# Altium PCB PCB_Rev3.PcbDoc
Units mil, origin at the board's own origin, x right, y up, seen from the top; angles counter-clockwise.
Board outline 1472.66 x 1252.33 mil, 4 copper layers (Top Layer, Layer 1 (GND), Layer 2 (PWR), Bottom Layer), stack 61.2 mil thick; 63 components, 42 nets, 246 pads, 78 vias.
Unrouted connection lines stored in the file: 48.
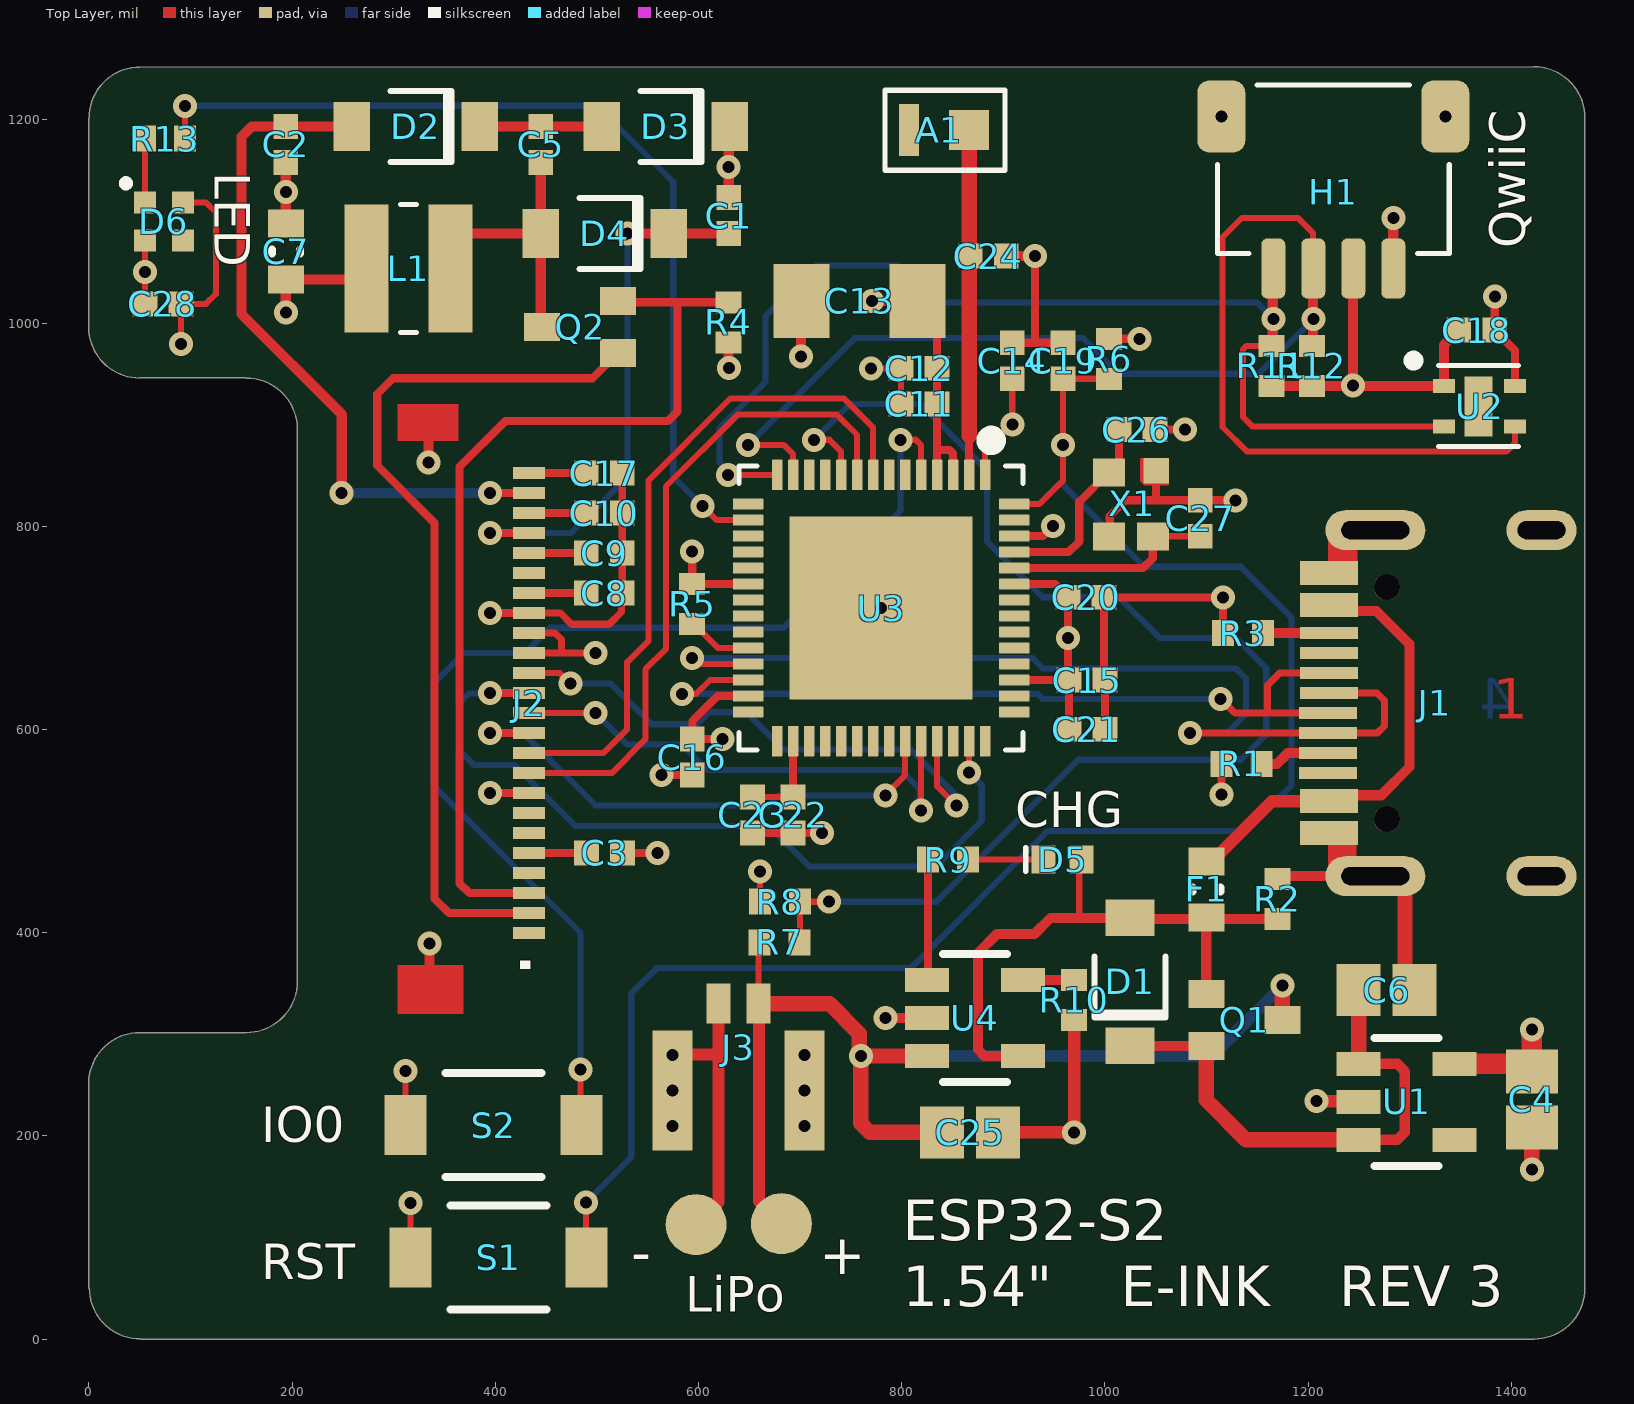
[diagram p0: Top Layer view]
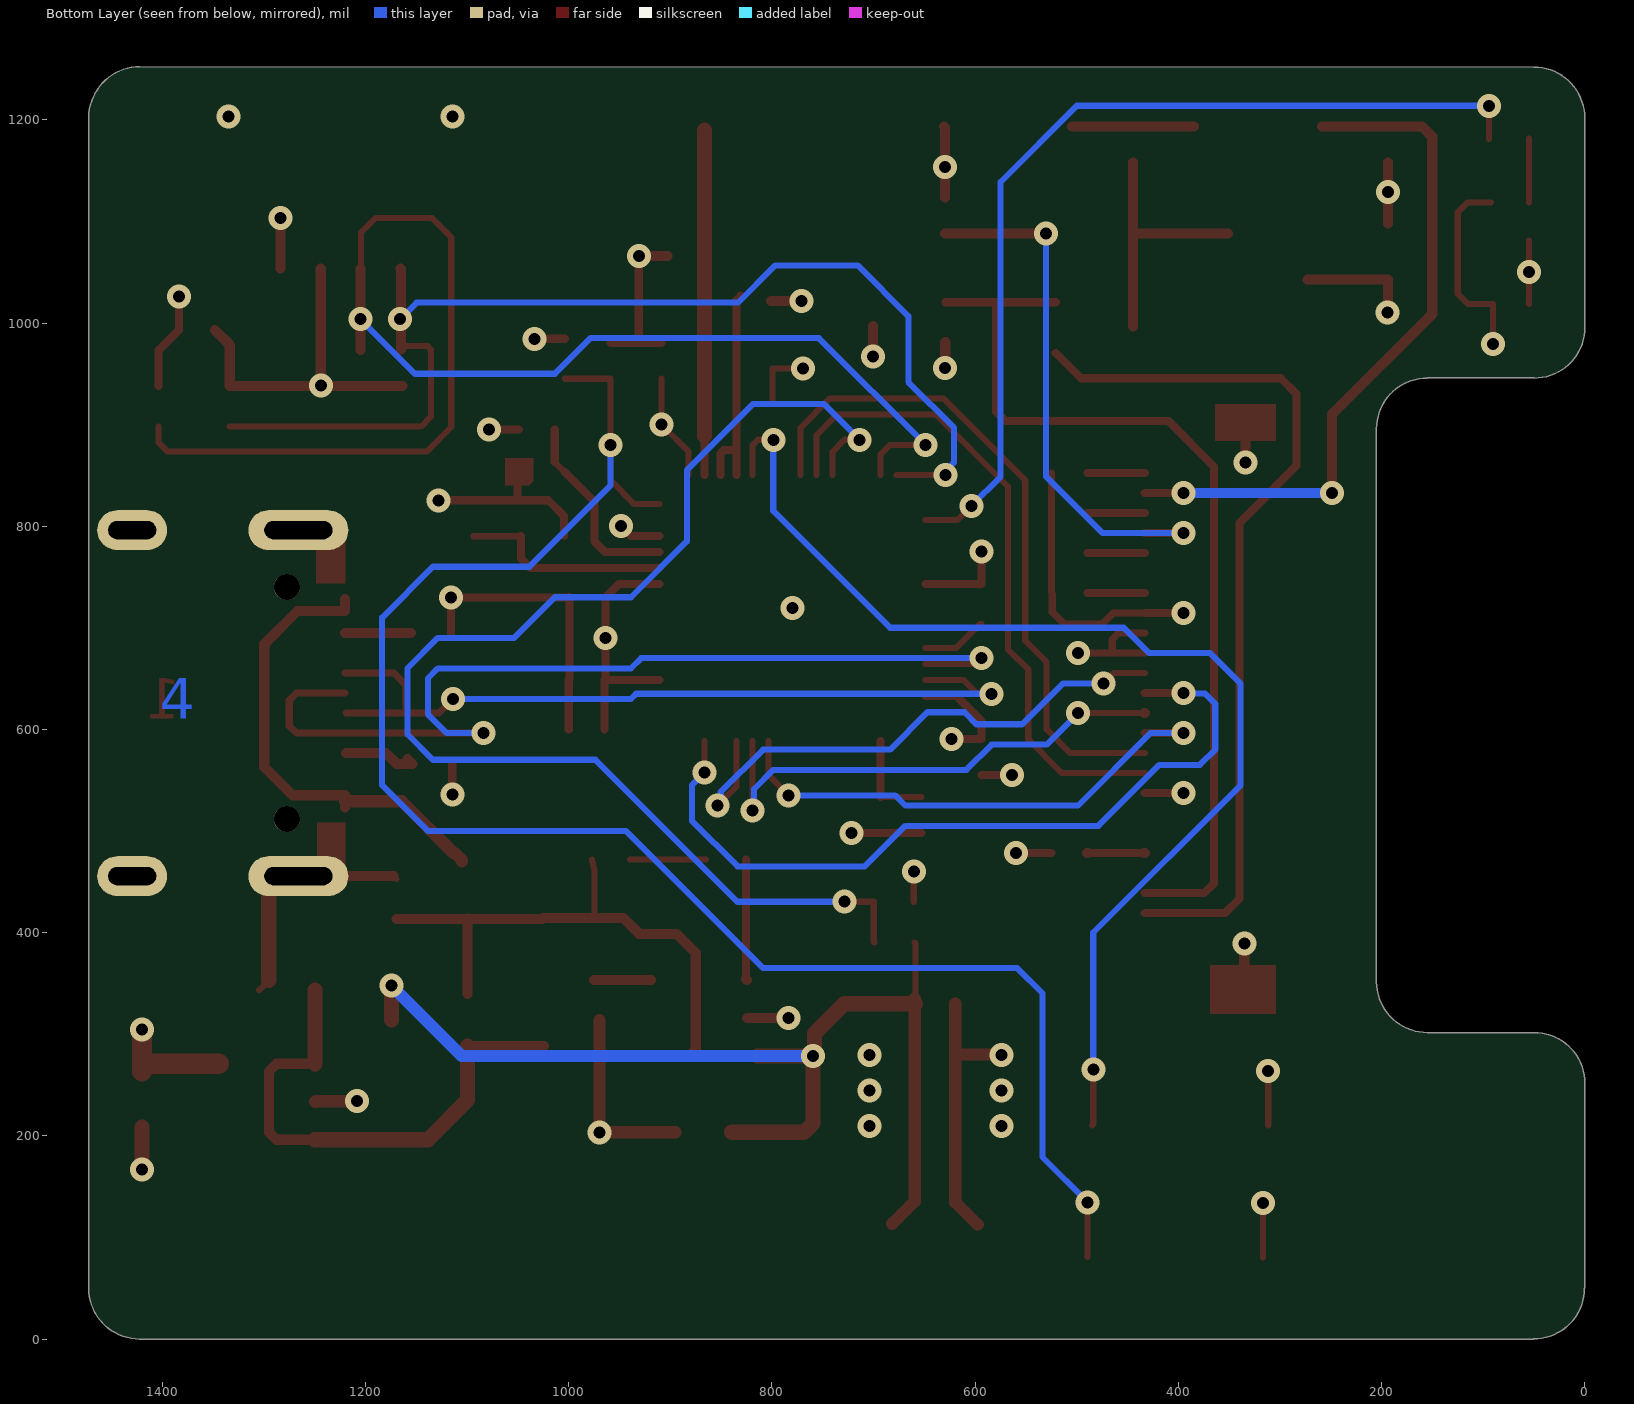
[diagram p1: Bottom Layer view, seen from below]
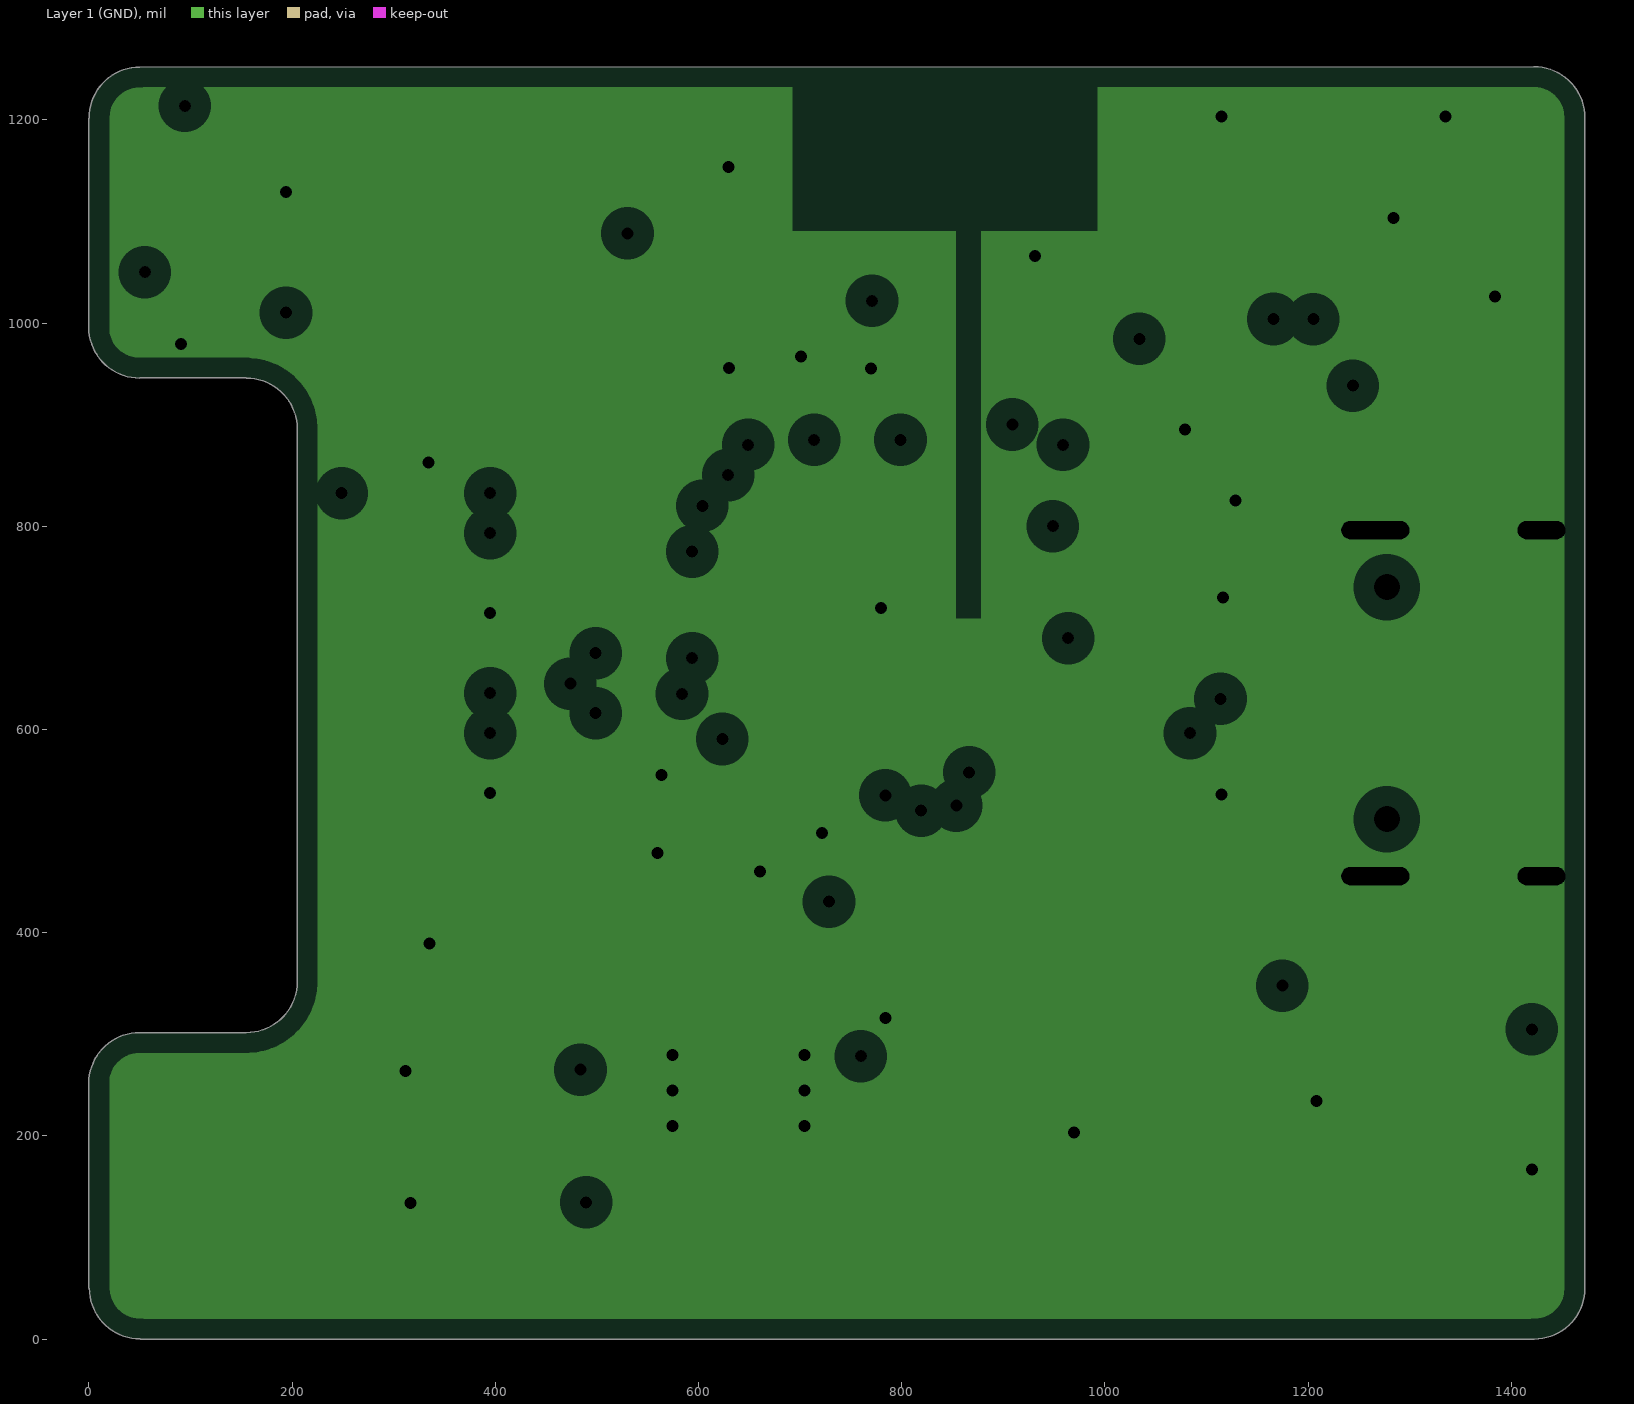
[diagram p2: Layer 1 (GND), clearances drawn from the general rule]
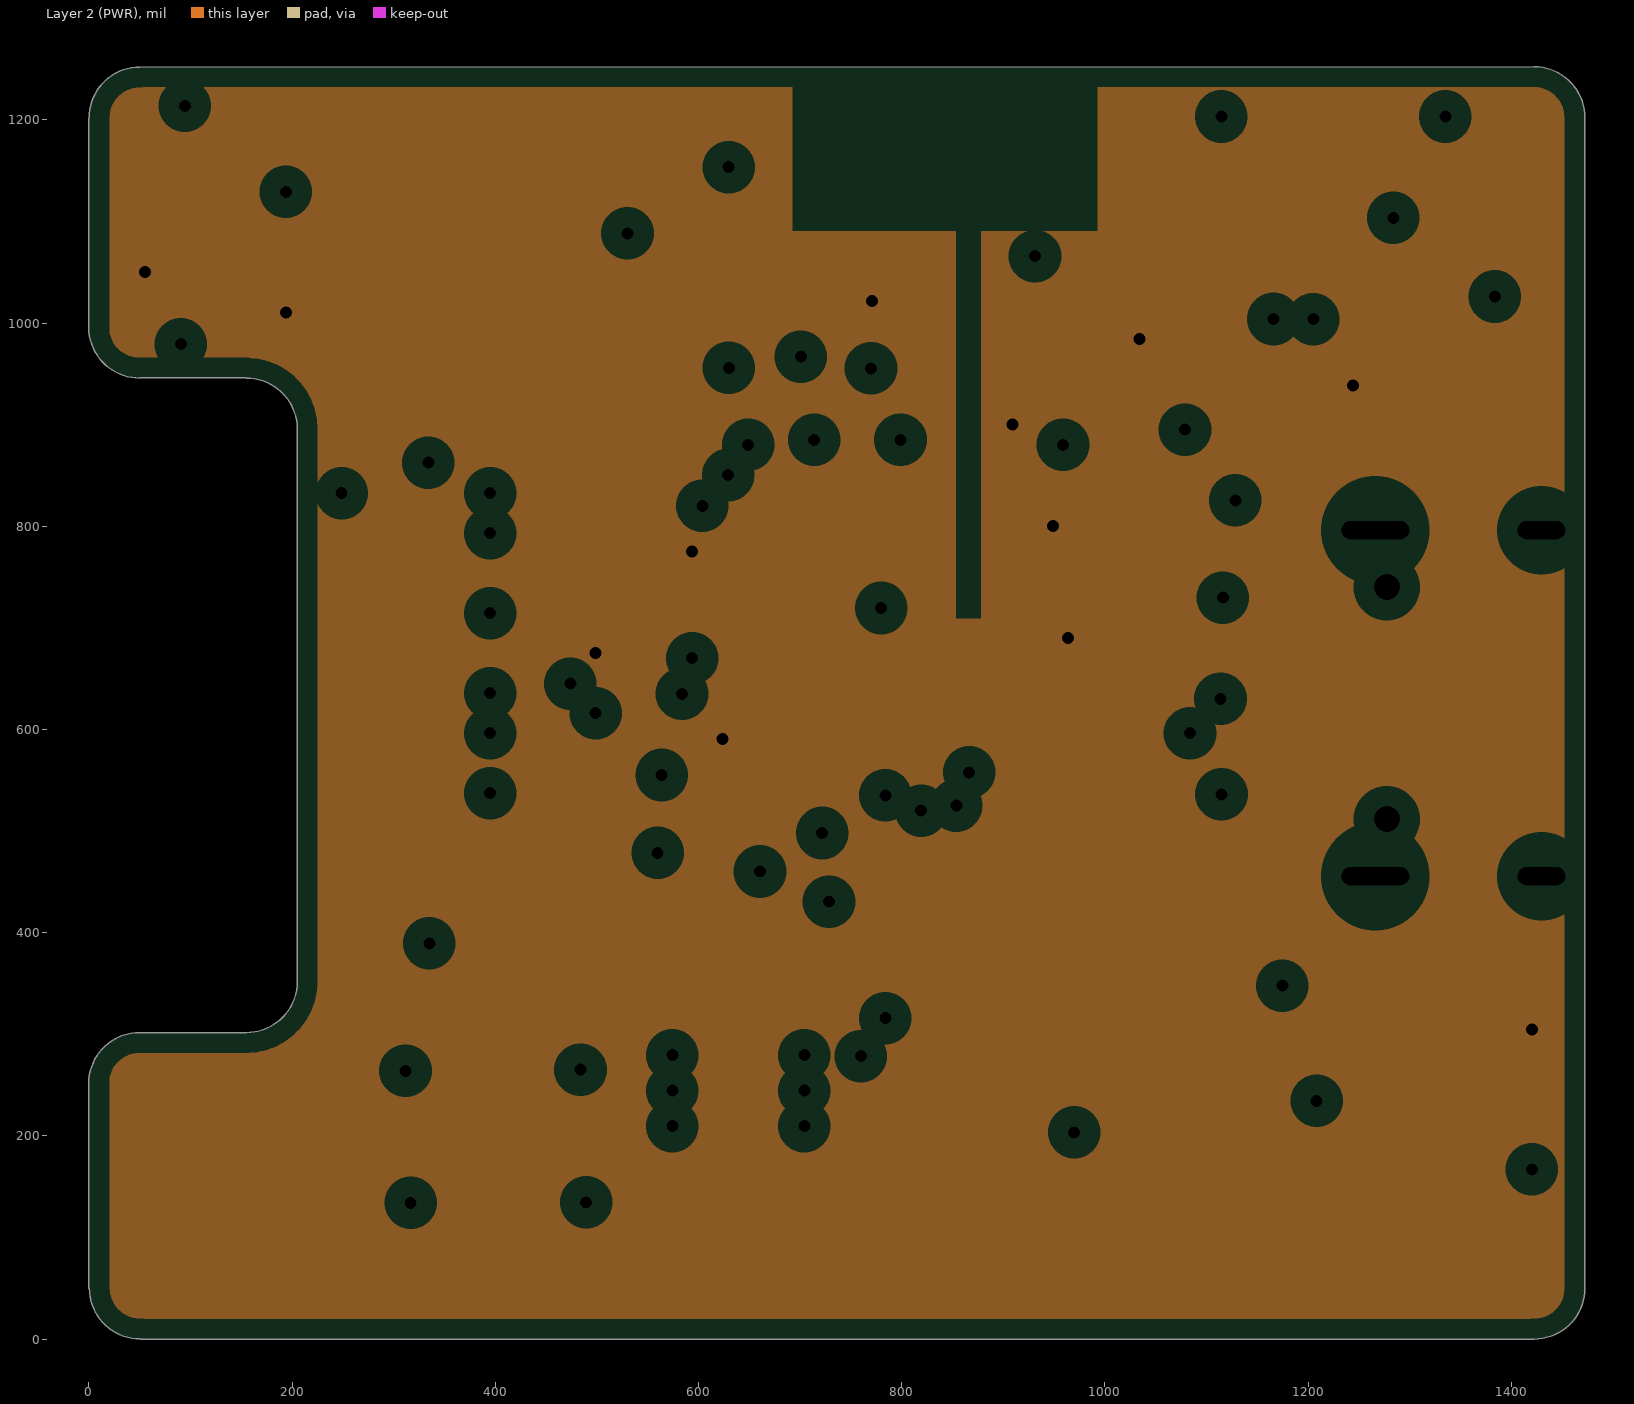
[diagram p3: Layer 2 (PWR), clearances drawn from the general rule]
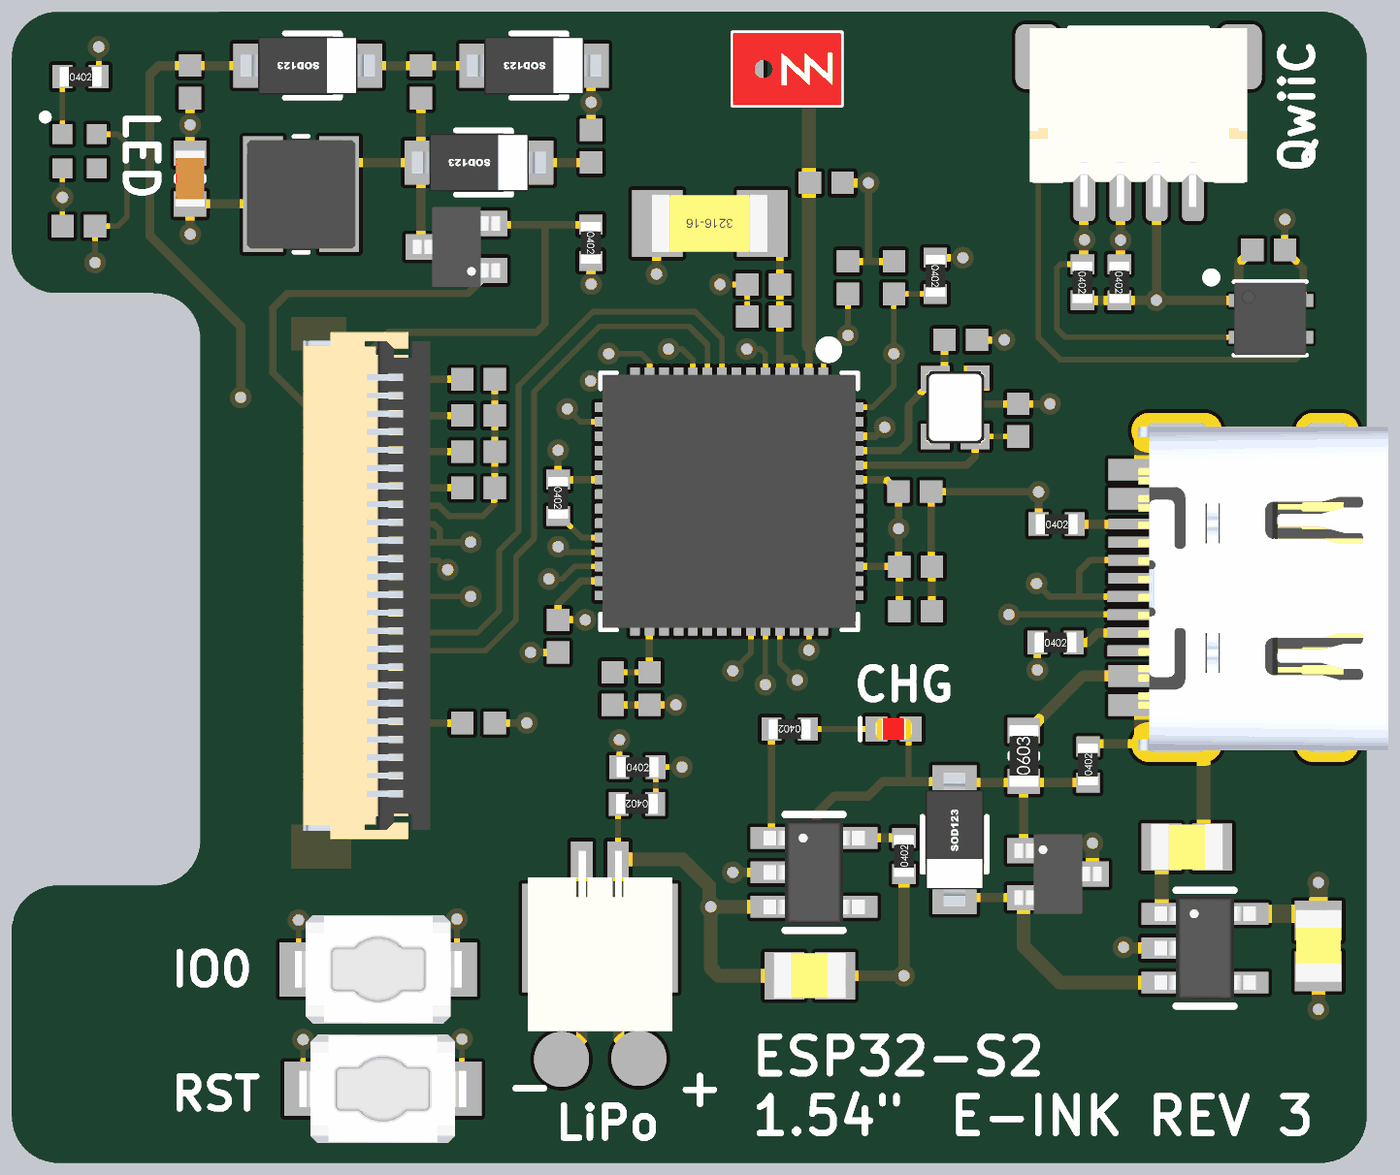
[diagram p4: 3D render of the assembled board from above, using the file's embedded part models]

## Layer stack, top to bottom
Top Solder: solder mask 0.4, Solder Resist, Dk 3.5
Top Layer: signal copper 1.4
Dielectric 2: prepreg 2.8, PP-006, Dk 4.1
Layer 1 (GND): plane copper 1.2, net GND
Dielectric 1: dielectric 50.4, FR-4, Dk 4.8
Layer 2 (PWR): plane copper 1.2, net +3.3V
Dielectric 3: prepreg 2.8, PP-006, Dk 4.1
Bottom Layer: signal copper 1.4
Bottom Solder: solder mask 0.4, Solder Resist, Dk 3.5

## Board outline
0,50.11 0,251.84 -0.22,251.84 cw(c49.78,251.76) 49.89,301.76 154.89,301.76 ccw(c155,351.76) 205,351.68 205,896 ccw(c155,895.92) 154.89,945.92 154.89,946.14 49.89,946.14 49.89,945.92 cw(c49.78,995.92) -0.22,995.85 0,995.85 0,1201.89 0.08,1201.89 cw(c50.08,1202) 50,1252 50,1251.97 1422.08,1252.33 cw(c1422.19,1202.08) 1472.44,1202.16 1472.44,50.19 cw(c1422.44,50.08) 1422.52,0.08 1422.11,0 50.44,0 50.44,0.19 cw(c50.33,50.19)

## Design rules (kind name [scope] priority, off if disabled: settings)
Clearance Clearance_U2 [All vs InComponent('U2')] p1: gap=6 ignorepadtopadclearanceinfootprint=FALSE
Clearance Clearance_U3 [All vs InComponent('U3')] p2: gap=5.5 ignorepadtopadclearanceinfootprint=FALSE
Clearance Clearance_J1 [All vs InComponent('J1')] p3: gap=5 ignorepadtopadclearanceinfootprint=FALSE
Clearance Clearance_J2 [All vs InComponent('J2')] p4: gap=5 ignorepadtopadclearanceinfootprint=FALSE
Clearance [All] p5: gap=7.7 ignorepadtopadclearanceinfootprint=FALSE
MinimumSolderMaskSliver [All] p1: minsoldermaskwidth=1.8
PlaneClearance [All] p1: clearance=20
PlaneConnect PlaneConnect_Via [(IsVia)] p1: planeconnectstyle=Direct reliefexpansion=20 reliefentries=4 reliefconductorwidth=10 reliefairgap=10
PlaneConnect [All] p2: planeconnectstyle=Relief reliefexpansion=20 reliefentries=4 reliefconductorwidth=10 reliefairgap=10
PolygonConnect [All] p1: connectstyle=Relief reliefconductorwidth=10 reliefentries=4 polygonreliefangle="90 Angle" airgapwidth=10
RoutingVias [All] p1: holewidth=28 width=50 viastyle="Through Hole" minholewidth=28 minwidth=50 maxholewidth=28 maxwidth=50
SilkToSilkClearance [All] p1: silktosilkclearance=2
SilkToSolderMaskClearance [IsPad] p1: minsilkscreentomaskgap=2 clearancetoexposedcopper=TRUE
SolderMaskExpansion [All] p1: expansion=4 istentingtop=FALSE
Width [All] p1: maxlimit=25 minlimit=6 preferedwidth=6
25 further rules are at their usual default settings.

## Components (designator, comment, footprint, x,y, rotation, side; value= is the part's Value field where it differs from the comment)
A1 "NN02-101" NN02-101 836.81,1189.88 r180 top value="Chip Antenna"
C1 "1uF" CAPC1005X56N 629.69,1105.87 r90 top
C2 "1uF" CAPC1005X56N 193.69,1175.87 r90 top
C3 "1uF" CAPC1005X56N 507.4,478.58 r180 top
C4 "10uF" CAPC2012X140N 1420.08,236.02 r270 top
C5 "1uF" CAPC1005X56N 444.69,1175.87 r270 top
C6 "10uF" CAPC2012X140N 1277.24,343.58 r0 top
C7 "2.2uF" CAPC1608X09L 193.69,1070.59 r90 top
C8 "1uF" CAPC1005X56N 507.17,734.25 r180 top
C9 "1uF" CAPC1005X56N 507.17,773.62 r180 top
C10 "1uF" CAPC1005X56N 507.17,812.99 r180 top
C11 "0.1uF" CAPC1005X56N 817.09,920.54 r180 top
C12 "1uF" CAPC1005X56N 817.09,955.54 r180 top
C13 "100uF" CAPC3216X160N 758.62,1021.91 r180 top
C14 "0.1uF" CAPC1005X56N 908.73,962.93 r90 top
C15 "0.1uF" CAPC1005X56N 982.4,648.72 r0 top
C16 "0.1uF" CAPC1005X56N 593.73,572.93 r270 top
C17 "1uF" CAPC1005X56N 507.17,852.36 r180 top
C18 "0.1uF" CAPC1005X56N 1365.97,993.15 r0 top
C19 "1uF" CAPC1005X56N 958.73,962.93 r90 top
C20 "0.1uF" CAPC1005X56N 981.45,730.21 r0 top
C21 "1uF" CAPC1005X56N 982.28,600.19 r0 top
C22 "0.1uF" CAPC1005X56N 693.07,515.91 r270 top
C23 "1uF" CAPC1005X56N 653.07,515.91 r270 top
C24 "1pF" CAPC1005X56N 885.16,1065.98 r0 top
C25 "10uF" CAPC2012X140N 867.24,203.58 r0 top
C26 "10pF" CAPC1005X56N 1031.45,895.21 r0 top
C27 "10pF" CAPC1005X56N 1093.73,807.93 r90 top
C28 "0.1uF" CAPC1005X56N 72.75,1018.91 r0 top
D1 "MBR0520" SOD123 1024.69,351.58 r90 top
D2 "MBR0520-TP" SOD123 321.69,1193.58 r180 top value=MBR0520
D3 "MBR0520-TP" SOD123 567.69,1193.58 r180 top value=MBR0520
D4 "MBR0520-TP" SOD123 507.69,1088.15 r180 top value=MBR0520
D5 "Red Led" LED1005X40N-Red 958.39,471.91 r0 top
D6 "RGB" SK6805-E-J 73.73,1100.21 r270 top value=NeoPixel
F1 "TLC-PSMD050" "RESC1608X06L (0603 FOOTPRINT)" 1100,442.74 r90 top
H1 "QWiiC" SM04B-SRSS-TB 1224.69,1128.58 r180 top locked
J1 "USB-C" TYPE-C-31-M-12 1421.81,796.26 r90 top locked
J2 "24POS Flex Connector" 687124182122 433.07,625.98 r90 top
J3 "CON2" JST_Micro_2PIN 639.21,330.2 r0 top locked
L1 "68uH" "INDUCTOR, 3mmX3mm" 314.47,1053.58 r180 top
Q1 "LP1480WT1G" SC-70 1137.09,314.17 r0 top
Q2 "AO7400" SC-70 483.31,996.32 r180 top
R1 "5.1K" "RESC1005X40L (0402 FOOTPRINT)" 1134.33,566.18 r0 top
R2 "100K" "RESC1005X40L (0402 FOOTPRINT)" 1169.69,433.27 r90 top
R3 "5.1K" "RESC1005X40L (0402 FOOTPRINT)" 1135.67,694.88 r0 top
R4 "2.2R" "RESC1005X40L (0402 FOOTPRINT)" 629.33,1000.87 r270 top
R5 "10K" "RESC1005X40L (0402 FOOTPRINT)" 593.73,723.52 r270 top
R6 "10K" "RESC1005X40L (0402 FOOTPRINT)" 1003.73,964.9 r270 top
R7 "100K" "RESC1005X40L (0402 FOOTPRINT)" 679.49,390.54 r180 top
R8 "100K" "RESC1005X40L (0402 FOOTPRINT)" 680.12,430.54 r0 top
R9 "4.7K" "RESC1005X40L (0402 FOOTPRINT)" 845.39,471.91 r180 top
R10 "4K" "RESC1005X40L (0402 FOOTPRINT)" 969.69,333.9 r90 top
R11 "10K" "RESC1005X40L (0402 FOOTPRINT)" 1163.69,957.83 r270 top
R12 "10K" "RESC1005X40L (0402 FOOTPRINT)" 1203.69,957.83 r270 top
R13 "100R" "RESC1005X40L (0402 FOOTPRINT)" 74.72,1181.51 r0 top
S1 "=Value" TS-1088R-02526 403.19,80.54 r180 top
S2 "=Value" TS-1088R-02526 398.19,210.54 r180 top
U1 "HT7833" SOT95P280X144-5N 1296.93,233.58 r0 top
U2 "SHTC3" "DFN-4 (2.0mm X 2.0mm)" 1368.69,918.15 r0 top value=Temp/Humid
U3 "ESP32-S2" "QFN56_0.4mm pitch - Rev2" 779.69,719.58 r270 top
U4 "MCP73831T-2ACI/OT" SOT95P280X144-5N 871.93,315.98 r0 top value=MCP73831T-2ACI
X1 "40 Mhz" OSC20X16 1027.01,822.39 r270 top

## Footprints (in the part's own frame and the unit in brackets; to place one, negate y for a bottom-side part, rotate by r counter-clockwise, add the part's x,y. Pads: shape width x height; smd on the part's side, far side on the other; paste and mask are expansions set on the pad)
687124182122 [mm] "CONN FFC TOP/BOT 24POS 0.50MM R/A"
  rect 0.3x0.8 smd: 1(-5.75,0) 2(-5.25,0) 3(-4.75,0) 4(-4.25,0) 5(-3.75,0) 6(-3.25,0) 7(-2.75,0) 8(-2.25,0) 9(-1.75,0) 10(-1.25,0) 11(-0.75,0) 12(-0.25,0) 13(0.25,0) 14(0.75,0) 15(1.25,0) 16(1.75,0) 17(2.25,0) 18(2.75,0) 19(3.25,0) 20(3.75,0) 21(4.25,0) 22(4.75,0) 23(5.25,0) 24(5.75,0)
  Top Layer region: 6.55,1.761 7.473,1.761 7.473,3.285 6.55,3.285
  Top Layer region: -7.767,1.634 -6.55,1.634 -6.55,3.285 -7.767,3.285
  body extent -6.95,-0.55 7.05,2.95, height 0.96
CAPC1005X56N [mm] "Chip Capacitor, 2-Leads, Body 1.0x0.5mm, IPC Medium Density (0402 ceramic)"
  rect 0.62x0.62 smd: 1(-0.45,0) 2(0.45,0)
  body extent -0.55,-0.3 0.55,0.3, height 0.6
CAPC1608X09L [mm] "Chip Capacitor, 2-Leads, Body 1.6x0.8mm, IPC High Density (0603 dense)"
  rect 0.7x0.9 smd: 1(-0.7,0) 2(0.7,0)
  silkscreen extent -0.05,-0.35 0.05,0.35, body extent -0.89,-0.48 0.88,0.48, height 1.03
CAPC2012X140N [mm] "Chip Capacitor, 2-Leads, Body 2.0x1.3mm, IPC Medium Density (0805 ceramic)"
  rect 1.1x1.3 smd: 1(-0.7,0) 2(0.7,0)
  body extent -1,-0.62 1,0.63, height 1.24
CAPC3216X160N [mm] "Chip Capacitor, 2-Leads, Body 3.2x1.6mm, IPC Medium Density(C1206)"
  rect 1.4x1.85 smd: 1(-1.45,0) 2(1.45,0)
  body extent -1.6,-0.8 1.6,0.8, height 1.89
"DFN-4 (2.0mm X 2.0mm)" [mm] "DFN-4 (2.0mm X 2.0mm)"
  rect 0.55x0.35 smd mask+0.076: 1(-0.889,0.508) 2(-0.889,-0.508) 3(0.889,-0.508) 4(0.889,0.508)
  rect 0.7x1.5 smd paste-0.1 mask+0.076: 7(-0.025,0)
  silkscreen extent -1.78,-1 0.97,1.27, body extent -1.02,-1 0.98,1, height 0.75
"INDUCTOR, 3mmX3mm" [mm] "Inductor, 2-Leads, (3mmX3mm)"
  rect 1.1x3.2 smd: 1(-1.05,0) 2(1.05,0)
  silkscreen extent -0.2,-1.6 0.2,1.6, body extent -1.5,-1.5 1.5,1.5, height 1.5
JST_Micro_2PIN [mm]
  rect 0.6x1 smd: 1(0.5,0) 2(-0.5,0)
  rect 1x3 smd: ""(-1.65,-2.175) ""(1.65,-2.175)
  body extent -1.99,-4.74 2,0.24, height 2.9
LED1005X40N-Red [mm] "Chip LED 2-Leads, Body 1.0x0.5mm, (0402)"
  rect 0.6x0.7 smd: 1(-0.475,0) 2(0.475,0)
  silkscreen extent -0.92,-0.3 -0.92,0.3, body extent -0.5,-0.3 0.5,0.3, height 0.2
NN02-101 [mm] "COMPACT REACH XTEND - 101"
  rect 1x1 smd: 1(-0.75,0)
  rect 0.5x1.3 smd: 2(0.75,0)
  silkscreen extent -1.65,-1 1.35,1, body extent -1.65,-1 1.35,1, height 0.8
OSC20X16 [mm] "Crystal 2.0mm x 1.60mm 0.5mm height"
  rect 0.7x0.8 smd: 1(-0.783,-0.591) 2(0.817,-0.591) 3(0.817,0.509)
  rect 0.635x0.635 smd: 4(-0.817,0.591)
  Top Layer region: -1.138,0.196 -0.554,0.196 -0.453,0.298 -0.453,0.907 -1.138,0.907
  body extent -1.01,-0.87 1.04,0.78, height 0.4
"QFN56_0.4mm pitch - Rev2" [mil] "QFN, 56-Leads, Body 7x7mm, Pitch 0.4mm, IPC Medium Density"
  rrect9% 30x10.5 smd: 1(-130.95,102.36) 2(-130.95,86.61) 3(-130.95,70.87) 4(-130.95,55.12) 5(-130.95,39.37) 6(-130.95,23.62) 7(-130.95,7.87) 8(-130.95,-7.87) 9(-130.95,-23.62) 10(-130.95,-39.37) 11(-130.95,-55.12) 12(-130.95,-70.87) 13(-130.95,-86.61) 14(-130.95,-102.36) 29(130.95,-102.36) 30(130.95,-86.61) 31(130.95,-70.87) 32(130.95,-55.12) 33(130.95,-39.37) 34(130.95,-23.62) 35(130.95,-7.87) 36(130.95,7.87) 37(130.95,23.62) 38(130.95,39.37) 39(130.95,55.12) 40(130.95,70.87) 41(130.95,86.61) 42(130.95,102.36)
  rrect9% 10.5x30 smd: 15(-102.36,-130.95) 16(-86.61,-130.95) 17(-70.87,-130.95) 18(-55.12,-130.95) 19(-39.37,-130.95) 20(-23.62,-130.95) 21(-7.87,-130.95) 22(7.87,-130.95) 23(23.62,-130.95) 24(39.37,-130.95) 25(55.12,-130.95) 26(70.87,-130.95) 27(86.61,-130.95) 28(102.36,-130.95) 43(102.36,130.95) 44(86.61,130.95) 45(70.87,130.95) 46(55.12,130.95) 47(39.37,130.95) 48(23.62,130.95) 49(7.87,130.95) 50(-7.87,130.95) 51(-23.62,130.95) 52(-39.37,130.95) 53(-55.12,130.95) 54(-70.87,130.95) 55(-86.61,130.95) 56(-102.36,130.95)
  rect 180x180 smd paste-157.48: 57(0,0)
  silkscreen extent -172,-140 140,140, body extent -138,-138 138,138, height 31
"RESC1005X40L (0402 FOOTPRINT)" [mm] "Chip Resistor, 2-Leads, Body 1.0x0.5mm, IPC Medium Density (0402)"
  rect 0.55x0.65 smd: 1(-0.5,0) 2(0.5,0)
  body extent -0.57,-0.27 0.58,0.28, height 0.41
"RESC1608X06L (0603 FOOTPRINT)" [mm] "Chip Resistor, 2-Leads, Body 1.6x0.8mm, IPC High Density (0603 dense)"
  rect 0.7x0.9 smd: 1(-0.7,0) 2(0.7,0)
  silkscreen extent -0.05,-0.35 0.05,0.35, body extent -0.85,-0.4 0.85,0.4, height 0.56
SC-70 [mm] "SOT23, 3-Leads, Body 2x1.25mm, Pitch 0.65mm"
  rect 0.9x0.7 smd: 1(-0.95,0.65) 2(-0.95,-0.65) 3(0.95,0)
  body extent -1.2,-1.1 1.2,1.1, height 1
SK6805-E-J [mm] "NeoPixel 1.5mm x 1.5mm"
  rect 0.55x0.55 smd: 1(-0.475,-0.475) 2(0.475,-0.475) 3(0.475,0.475) 4(-0.475,0.475)
  silkscreen extent -1.03,-1.03 -0.87,-0.87, body extent -0.7,-0.7 0.7,0.7, height 0.65
SM04B-SRSS-TB [mm] "CONN HEADER 4POS .100 R/A QWIIC"
  rrect50% 0.6x1.5 smd: 1(1.5,1.9) 2(0.5,1.9) 3(-0.5,1.9) 4(-1.5,1.9)
  rrect50% 1.2x1.8 smd: 5(-2.8,-1.9) 5(2.8,-1.9)
  silkscreen extent -2.9,-2.69 2.9,1.52, body extent -3,-2.69 3,2.26, height 3.25
SOD123 [mil] "Molded Diode, 2-Leads, Body 2.85x1.8mm, IPC Medium Density (SOD123)"
  rect 36x48 smd: 1(-63,0) 2(63,0)
  silkscreen extent -35,-35 25,35, body extent -73,-31 73,31, height 50
SOT95P280X144-5N [mm] "SOT23, 5-Leads, Body 3.1x3.0mm (max), Pitch 0.95mm, IPC Medium Density (RFMD SOT23-5)"
  rect 1.1x0.6 smd: 1(-1.2,0.95) 2(-1.2,0) 3(-1.2,-0.95) 4(1.2,-0.95) 5(1.2,0.95)
  silkscreen extent -0.8,-1.6 0.8,1.6, body extent -1.4,-1.45 1.4,1.45, height 1.45
TS-1088R-02526 [mm] "SWITCH TACTILE SPST-NO 0.05A 12V"
  rect 1.05x1.5 smd: 1(-2.2,0) 2(2.2,0)
  silkscreen extent -1.2,-1.3 1.2,1.3, body extent -2.3,-1.5 2.3,1.5, height 2
TYPE-C-31-M-12 [mm] "USB-C Connector"
  oval 1x1.75 hole 0.45 slot 1.2 at 90 deg: 1(-8.65,-0.2) 1(0,-0.2)
  oval 1x2.5 hole 0.45 slot 1.7 at 90 deg: 1(-8.65,3.955) 1(0,3.955)
  rect 0.3x1.45 smd: A1(-7.726,5.119) A4(-6.926,5.117) A5(-5.575,5.142) A6(-4.575,5.142) A7(-4.075,5.117) A8(-3.075,5.117) A9(-1.727,5.117) A12(-0.924,5.117) B1(-1.224,5.117) B4(-2.021,5.117) B5(-2.575,5.117) B6(-3.575,5.117) B7(-5.075,5.142) B8(-6.075,5.142) B9(-6.626,5.117) B12(-7.426,5.119)
  round 0.65 hole 0.65 unplated: ""(-7.225,3.667) ""(-1.425,3.667)
  body extent -8.82,-1.89 0.12,5.01, height 3.31

## Part data
A1: "Antenna Chip 2.4Gig", Manufacturer=Ignion, Part_Number=NN02-101, Vendor=Digi-Key
C1 C2 C3 C5 C8 C9 C10 C12 C17 C19 C21: library part CAP_0402, "CAP 1uF 0402"
  C1 C2 C3 C5 C8 C9 C10 C17: Part_Footprint=0402
  C12 C21: Part_Footprint=0402, Vendor=LCSC
C4 C6 C25: library part CAP_0805, "CAP 10uF 0805", Part_Footprint=0805
C7: library part CAP_0402, "CAP 2.2uF 0603", Part_Footprint=0603
C11 C14 C15 C16 C18 C20 C22 C23 C28: library part CAP_0402, "CAP 0.1uF 0402", Part_Footprint=0402
  C11 C14 C15 C16 C20 C22 C23 C28: Vendor=LCSC
C13: library part CAP_1206, "CAP 100uF 1206", Part_Footprint=1206
C24: library part CAP_0402, "CAP 1pF 0402", Part_Footprint=0402
C26 C27: library part CAP_0402, "CAP 10pF 0402", Part_Footprint=0402, Vendor=LCSC
D1: library part MBR0520-TP, "DIODE SCHOTTKY 20V 500MA SOD-123", Manufacturer=Micro, Part_Footprint=SOD-123, Part_Number=C78746, Vendor=LCSC
D2 D3 D4: "DIODE SCHOTTKY 20V 500MA SOD-123", Manufacturer=Micro, Part_Footprint=SOD-123, Part_Number=C78746, Vendor=LCSC
D5: library part LED_0402_SMALL_Red, "LED Red 0402", Manufacturer=Lite-On, Part_Footprint=0402, Part_Number=C364556, Vendor=LCSC
D6: library part SK6805-E-J-1515, "LED,RGB,NEOPIXEL,SK6805-E-J 1515", Manufacturer=Adafruit, Part_Footprint=SMD-1515, Part_Number=4492, Vendor=Digi-Key
F1: library part PTC_FUSE, "PTC FUSE 500mA hold, 1A trip", Manufacturer=TLC, Part_Number=C261942, Vendor=LCSC
H1: library part SM04B-SRSS-TB, "CONN HEADER 4POS .100 R/A QWIIC", Manufacturer=JST, Part_Number=PRT-14417, Vendor=Digi-Key
J1: "CONN RECPT USB-C", Manufacturer=KHE, Part_Footprint=SMT, Part_Number=C165948, Vendor=LCSC
J2: library part 687124182122, "CONN FFC TOP/BOT 24POS 0.50MM R/A", Manufacturer=Wurth, Part_Number=687124182122, Vendor=Digi-Key
J3: library part JST_Micro_CONN_2PIN, "JST MIcro CONN 2POS"
L1: "INDUCTOR 68uH 20% 4mmx4mm", Manufacturer=SXN, Part_Footprint=4mmx4mm, Part_Number=C135265, Vendor=LCSC
Q1: "MOSFET P-CH 20V 1.4A SC-70", Manufacturer=LRC, Part_Footprint=SC-70, Part_Number=C172434, Vendor=LCSC
Q2: "MOSFET N-CH 20V 4A SC70-3", Manufacturer="VBSemi Elec", Part_Footprint=SC70-3, Part_Number=AO7400, Vendor=LCSC
R1 R3: library part RES_0402, "RES 5.1K 0402", Part_Footprint=0402
R2 R7 R8: library part RES_0402, "RES 100K 0402", Part_Footprint=0402
R4: library part RES_0402, "RES 2.2R 0402", Part_Footprint=0402
R5 R6: library part RES_0402, "RES 10K 0402", LCSC_Part_Number=C258091, Manufacturer=Guangdong, Man_Part_Number=RC-02W1002FT, Vendor=LCSC
R9: library part RES_0402, "RES 4.7K 0402", Part_Footprint=0402
R10: library part RES_0402, "RES 4K 0402", Part_Footprint=0402
R11 R12: library part RES_0402, "RES 10K 0402", Part_Footprint=0402
R13: library part RES_0603, "RES 100R 0402", Manufacturer=Yageo, PartNumber=C106232, Man_Part_Number=RC0402FR-07100RL, Vendor=LCSC
S1 S2: library part TS-1088R-02526, "Tactile Micro Switch", Manufacturer=XUNPU, Part_Footprint=SMD, Part_Number=C455281, Vendor=LCSC
U1: "IC LDO 3.3V 0.5A SOT23-5", Manufacturer=Holtek, Part_Footprint=SOT23-5, Part_Number=C164106, Vendor=LCSC
U2: "Humidity/Temperature Sensor", Manufacturer=Sensirion, Part_Number=SHTC3, Vendor=LCSC
U3: "WIFI/Bluetooth, QFN-56 7x7", Manufacturer=Espressif, Part_Footprint=QFN56, Part_Number=C529594, Vendor=LCSC
U4: "Charger IC Lithium-Ion/Polymer SOT23-5", Manufacturer=Microchip, Part_Number=MCP73831T-2ACI/OT, Vendor=Digi-Key
X1: library part 40Mhz, "CRYSTAL 40MHZ 10PF SMD", Manufacturer=ECS, Part_Number=ECS-400-10-37B2-CKM, Vendor=Digi-Key

## Free pads (board coordinates)
  round 60 smd: 2(597.5,112.69) 2(681.56,113.63)

## Via types
v1: diameter 23.62, hole 11.81, Top Layer to Bottom Layer, tented both sides, 78 vias

## Nets (pads, with @x,y where several pads share a name; then routed paths per layer and width w, separated by ;. In a path a pad name is that pad's centre, name@x,y a point inside that pad or via, vN(x,y) a via of type N, cw(c..) or ccw(c..) an arc to the next point about the centre after c; other vN are vias at no path point)
+3.3V: C4.1 C7.1 C11.1 C12.1 C13.1 C14.1 C15.1 C16.1 C18.1 C20.1 C21.1 C28.1 D6.2 H1.3 J2.15 J2.16 L1.2 R5.1 R6.1 R11.2 R12.2 U1.5 U2.1 U3.1 U3.3 U3.4 U3.20 U3.27 U3.45 U3.51 U3.54 | length 1622.9
  Top Layer w6: D6.2 C28.1 C28.1@55.29,1019.17 ; C16.1 C16.1@593.86,590.77 ; U3.1 882.05,873.53 v1(908.73,900.21) C14.1 ; C15.1@963.73,649.67 C15.1 ; v1(1243.94,938.41) v1@1244.16,938.62 ; H1.3@1244.16,1053.57 H1.3
  Top Layer w7: J2.15 465.08,675.2 ; J2.16 458.78,694.88 465.08,688.58 465.08,675.2 ; v1(498.73,675.21) 465.08,675.2
  Top Layer w8: C16.1 v1(623.3,590.65) ; v1(593.73,775.21) R5.1 U3.20 ; C16.1@593.86,590.77 593.86,608.34 618.49,632.97 U3.27 ; C13.1@830.71,1026.91 834.8,1022.82 C12.1 C11.1 834.8,875.21 ; U3.4 834.8,875.21 ; U3.3 850.55,871.7 847.04,875.21 834.8,875.21 ; U3.45 C15.1 C21.1@964.69,600.3 ; U3.51 950.74,743.2 C20.1 v1(963.73,689.94) C15.1@963.73,649.67 ; U3.54 938.97,790.45 v1(948.73,800.21) ; R6.1 v1(1033.73,984.58)
  Top Layer w10: v1@193.69,1009.98 C7.1 L1.2@273.03,1043.03 ; v1(770.71,1021.91) C13.1@800.71,1021.91 ; R11.2 R12.2 v1@1243.69,938.15 ; v1(1243.94,938.41) v1@1243.69,938.15 ; v1@1244.16,938.62 H1.3@1244.16,1053.57 ; C18.1 1333.69,978.58 U2.1 v1@1243.69,938.15 ; C4.1@1412.68,270.98 C4.1
  Top Layer w20: U1.5 C4.1@1412.68,270.98 ; C4.1 v1(1420.08,305)
  other v1: 193.94,1010.23 55.03,1050.21
+3.3V_VDD_SPI: C22.1 C23.1 U3.30 | length 95
  Top Layer w6: C23.1 C22.1
  Top Layer w8: C22.1 U3.30
BAT_V: R7.1 R8.2 U3.10 | length 1295.1
  Top Layer w6: R7.1 699.8,391.17 R8.2 v1(728.41,430.54) ; v1(713.73,885.21) 728.73,885.21 740.32,873.63 U3.10
  Bottom Layer w6: v1(713.73,885.21) 748.73,920.21 818.73,920.21 883.73,855.21 883.73,785.21 938.73,730.21 1013.73,730.21 1053.73,690.21 1128.73,690.21 1158.73,660.21 1158.73,595.21 1133.73,570.21 973.73,570.21 834.06,430.54 v1(728.41,430.54)
D+: J1.A6 J1.B6 U3.26 | length 809.2
  Top Layer w6: v1@585.45,636.93 v1(583.73,635.21) 597.73,635.21 611.24,648.72 U3.26
  Top Layer w7: v1(1113.73,630.21) 1127.8,616.14 1160.08,616.14 ; J1.A6 1160.08,616.14 ; J1.B6 1172.01,655.51 1160.08,643.58 1160.08,616.14
  Bottom Layer w6: v1(583.73,635.21) 933.73,635.21 938.73,630.21 v1(1113.73,630.21)
D-: J1.A7 J1.B7 U3.25 | length 985.5
  Top Layer w6: v1(593.73,670.21) 599.48,664.46 U3.25
  Top Layer w7: v1(1083.73,596.46) J1.B7 1267.95,596.46 1275.08,603.58 1275.08,628.58 1267.83,635.83 J1.A7
  Bottom Layer w6: v1(593.73,670.21) 928.73,670.21 938.73,660.21 1128.73,660.21 1138.73,650.21 1138.73,615.21 1119.98,596.46 v1(1083.73,596.46)
E-INK_BSY: J2.9 U3.9 | length 650.9
  Top Layer w6: J2.9 514.61,557.09 547.73,590.21 547.73,659.21 567.73,679.21 567.73,839.21 638.43,909.91 736.03,909.91 756.06,889.88 U3.9
E-INK_CS: J2.12 U3.38 | length 505.7
  Top Layer w6: J2.12 v1(498.73,616.14) ; v1(819.06,520.21) U3.38
  Bottom Layer w6: v1(498.73,616.14) 529.66,585.21 583.73,585.21 608.73,560.21 798.73,560.21 817.68,541.27 817.68,521.59 v1(819.06,520.21)
E-INK_DC: J2.11 U3.37 | length 522.3
  Top Layer w6: v1(783.73,535.21) 803.31,554.79 U3.37
  Top Layer w8: v1(394.84,596.46) J2.11
  Bottom Layer w6: v1(394.84,596.46) 427.49,596.46 498.73,525.21 668.73,525.21 678.73,535.21 v1(783.73,535.21)
E-INK_RST: J2.10 U3.8 | length 673.1
  Top Layer w6: J2.10 506.29,576.77 529.73,600.21 529.73,666.21 550.73,687.21 550.73,845.21 631.43,925.91 743.03,925.91 771.81,897.13 U3.8
GDR: J2.2 Q2.1 | length 872.8
  Top Layer w8: J2.2 354.17,419.29 340,433.46 340,803.46 283.73,859.73 283.73,930.21 299.27,945.75 495.72,945.75 Q2.1
GND: C1.2 C2.1 C3.1 C4.2 C6.2 C7.2 C8.1 C9.1 C10.1 C11.2 C12.2 C13.2 C14.2 C15.2 C16.2 C17.1 C18.2 C19.2 C20.2 C21.2 C22.2 C23.2 C24.2 C25.2 C26.2 C27.2 C28.2 D3.1 D6.4 H1.4 H1.5 J1.1 J1.A1 J1.A12 J1.B1 J1.B12 J2.8 J2.17 J3. J3.2 pad.2@597.5,112.69 R1.1 R2.2 R3.1 R4.2 R8.1 R10.1 S1.2 S2.2 U1.2 U2.4 U3.57 U4.2 X1.2 X1.4 | length 2788.8
  Top Layer w6: v1(90.46,979.35) C28.2 115.03,1018.91 125.03,1028.91 125.03,1108.91 115.03,1118.91 D6.4 ; S2.2 v1(311.57,264.14) ; S1.2 v1(316.57,134.14) ; v1(574.25,279.57) J3.@574.87,280.19 ; R8.1 v1(660.43,460.21) ; v1@768.73,955.54 C12.2 C11.2 ; 931.09,983.29 933.73,980.65 ; C15.2@999.17,649.67 C15.2 ; C20.2 C20.2@999.5,729.88 ; X1.2 X1.2@1004.73,791.21 ; R2.2 R2.2@1172.44,455.71 ; J1.1@1266.1,455.71 1286.6,455.71 J1.1@1295.39,446.92 ; C6.2@1295.39,352.99 C6.2
  Top Layer w7: J2.17 464.09,714.57 475.08,703.58 512.1,703.58 524.17,715.65 524.17,733.54 C8.1 C9.1 C10.1 C17.1
  Top Layer w8: v1(394.84,537.4) J2.8 ; v1(394.84,714.57) J2.17 ; C3.1 v1(559.69,478.58) ; v1(563.73,555.21) C16.2 ; C23.2 C22.2 v1(721.72,498.2) ; C14.2 933.73,980.65 C19.2 ; 931.09,983.29 v1(931.09,1065.98) ; C15.2@999.17,649.67 C20.2 ; C20.2@999.5,729.88 v1(1115.98,729.88) R3.1 ; C21.2 C15.2@1000,648.6 ; X1.2@1004.73,791.21 1004.73,810.21 1020.17,825.65 C27.2 v1(1128.3,825.65) ; C26.2 v1(1078.73,895.21) ; 1050.29,826.21 X1.4 ; v1(1114.65,536.18) R1.1 ; v1(1383.69,1026.18) C18.2 1403.69,973.15 U2.4
  Top Layer w10: C7.2 C2.1 ; v1(334.08,862.58) 334.08,891.58 ; 335.08,360.58 v1(335.08,389.58) ; R4.2 629.52,980.99 629.52,956.1 v1(629.71,955.91) ; C1.2 629.69,1192.58 D3.1 ; v1(700.71,966.91) C13.2@700.71,996.91 ; v1(783.73,315.98) U4.2 ; C24.2 v1(931.09,1065.98) ; R2.2@1172.44,455.71 J1.1@1266.1,455.71 ; H1.4 v1(1283.74,1103.58)
  Top Layer w12: J3.@574.87,280.19 619.53,280.19 J3.2 619.53,134.71 pad.2@597.5,112.69 ; C25.2 v1(969.69,203.58) R10.1 ; v1@1208.89,234.08 1249.19,234.08 U1.2
  Top Layer w15: C6.2@1295.39,352.99 J1.1@1295.39,446.92 ; v1(1420.08,167.05) C4.2
  other v1: 574.25,209.57 704.17,209.57 1208.39,234.58 574.25,244.57 704.17,244.57 704.17,279.57 779.69,719.58 769.69,955.54 193.69,1129.15 629.69,1153.58 1114.45,1203.39 1334.92,1203.39
GPIO0: S2.1 U3.5 | length 1147.5
  Top Layer w6: v1(483.73,265.21) 483.73,211.61 S2.1 ; v1(798.73,885.21) 813.73,885.21 819.06,879.89 U3.5
  Bottom Layer w6: v1(483.73,265.21) 483.73,400.21 338.73,545.21 338.73,645.21 368.73,675.21 428.73,675.21 453.73,700.21 683.73,700.21 798.73,815.21 v1(798.73,885.21)
GPIO18: R5.2 U3.24 | length 64.8
  Top Layer w6: R5.2 595.7,703.83 619.32,680.21 U3.24
LiPO: C25.1 J3.1 pad.2@681.56,113.63 Q1.3 R7.2 U4.3 | length 1107.7
  Top Layer w6: J3.1 658.9,389.63 R7.2
  Top Layer w12: J3.1@659.53,335.2 659.53,330.2 659.53,135.66 pad.2@681.56,113.63
  Top Layer w15: J3.1 659.53,330.2 728.75,330.2 758.04,300.91 758.04,280.23 v1(759.69,278.58) ; U4.3@814.69,278.58 v1(759.69,278.58) ; C25.1 768.47,203.58 759.69,212.37 v1(759.69,278.58) ; Q1.3 v1(1174.49,347.83)
  Bottom Layer w12: v1(759.69,278.58) 1105.24,278.58 v1(1174.49,347.83)
MOSI: J2.14 U3.39 | length 561.5
  Top Layer w6: J2.14 463.43,655.51 v1(473.73,645.21) ; U3.39 834.8,544.14 v1(853.73,525.21)
  Bottom Layer w6: v1(473.73,645.21) 513.73,645.21 553.73,605.21 598.73,605.21 610.49,616.97 646.98,616.97 683.73,580.21 808.73,580.21 850.36,538.58 850.36,528.58 v1(853.73,525.21)
NEOPIXEL: R13.2 U3.16 | length 925.5
  Top Layer w6: R13.2 v1(94.4,1213.91) ; v1(603.73,820.21) 617.75,806.2 U3.16
  Bottom Layer w6: v1(94.4,1213.91) 500.03,1213.91 575.03,1138.91 575.03,848.91 v1(603.73,820.21)
NetA1_1: A1.1 C24.1 U3.2 | length 339.4
  Top Layer w6: 866.3,888.87 866.34,888.91
  Top Layer w8: U3.2 866.3,888.87
  Top Layer w15: 866.34,888.91 A1.1
NetC3_2: C3.2 J2.5 | length 56.7
  Top Layer w8: J2.5@433.19,478.46 C3.2@489.57,478.46
  Top Layer w10: J2.5 J2.5@433.19,478.46 ; C3.2@489.57,478.46 C3.2
NetC5_1: C5.1 D2.1 D3.2 | length 120
  Top Layer w10: D2.1 C5.1 D3.2
NetC5_2: C5.2 D4.2 L1.1 Q2.3 | length 254.7
  Top Layer w10: L1.1@351.25,1088.15 D4.2 ; Q2.3@444.69,996.91 D4.2 ; C5.2 D4.2
NetC6_1: C6.1 D1.1 Q1.2 U1.1 U1.3 | length 524
  Top Layer w10: D1.1 Q1.2 ; U1.3 1287.68,196.18 1295.08,203.58 1295.08,263.58 1287.68,270.98 U1.1
  Top Layer w15: Q1.2 1099.69,235.32 1138.82,196.18 U1.3 ; U1.1 C6.1
NetC8_2: C8.2 J2.18 | length 56.4
  Top Layer w8: J2.18 C8.2
NetC9_2: C9.2 J2.20 | length 56.4
  Top Layer w8: J2.20 C9.2
NetC10_2: C10.2 J2.22 | length 56.4
  Top Layer w8: J2.22 C10.2
NetC17_2: C17.2 J2.24 | length 56.4
  Top Layer w8: J2.24 C17.2
NetC19_1: C19.1 R6.2 S1.1 U3.56 | length 1699.1
  Top Layer w6: S1.1@489.27,81.07 v1(489.27,134.68) ; U3.56 935.46,821.95 958.73,845.21 v1(958.73,880.21) C19.1 R6.2
  Bottom Layer w6: v1(489.27,134.68) 533.73,179.14 533.73,340.21 558.73,365.21 808.73,365.21 943.73,500.21 1138.73,500.21 1183.73,545.21 1183.73,710.21 1133.73,760.21 1038.73,760.21 958.73,840.21 v1(958.73,880.21)
NetD5_1: D5.1 R9.1 | length 74.6
  Top Layer w6: R9.1 D5.1
NetD6_1: D6.1 R13.1 | length 62.6
  Top Layer w6: D6.1 R13.1
NetF1_2: F1.2 J1.A4 J1.A9 J1.B4 J1.B9 | length 468.5
  Top Layer w10: J1.A4 1220.36,529.48 J1.B9 1271.88,535.38 1299.69,563.19 1299.69,683.98 1266.98,716.68 J1.B4 J1.A9
  Top Layer w12: F1.2@1105,470.19 1105,471.37 1111.72,478.08 1112.9,478.08 1164.3,529.48 J1.B9@1220.36,529.48
NetJ1_A5: J1.A5 R1.2 | length 76
  Top Layer w10: R1.2 R1.2@1158.67,570.84 ; R1.2@1154.33,566.18 1169.33,566.18 1179.92,576.77 J1.A5
NetJ1_B5: J1.B5 R3.2 | length 65
  Top Layer w10: R3.2 J1.B5
NetR9_2: R9.2 U4.1 | length 119
  Top Layer w8: U4.1@825.71,354.41 R9.2
  Top Layer w10: U4.1 U4.1@825.71,354.41
NetR10_2: R10.2 U4.5 | length 56
  Top Layer w10: U4.5 919.27,353.48 969.59,353.48 R10.2 R10.2@975.08,353.58
RESE: J2.3 Q2.2 R4.1 | length 935.5
  Top Layer w8: J2.3 374.49,438.98 364.84,448.62 364.84,858.62 409.8,903.58 570.08,903.58 579.33,912.83 579.33,1020.55 ; Q2.2@520.71,1020.55 579.33,1020.55 ; R4.1 579.33,1020.55
SCL: H1.1 R11.1 U2.2 U3.14 | length 1147.1
  Top Layer w6: v1(629.06,850.54) U3.14 ; R11.1 1139.2,977.52 1135.69,974.01 1135.69,907.78 1145.32,898.15 U2.2
  Top Layer w10: R11.1@1165.16,974.06 1165.16,1053.31 H1.1
  Bottom Layer w6: v1(629.06,850.54) 629.06,854.51 620.71,862.86 620.71,896.91 665.71,941.91 665.71,1006.91 715.71,1056.91 796.71,1056.91 833.41,1020.21 1149.71,1020.21 v1(1165.89,1004.04)
SCLK: J2.13 U3.41 | length 783.6
  Top Layer w6: v1(866.3,557.78) U3.41
  Top Layer w8: v1(394.84,635.83) J2.13
  Bottom Layer w6: v1(394.84,635.83) 394.53,635.51 374.03,635.51 363.73,625.21 363.73,580.21 378.73,565.21 418.73,565.21 478.73,505.21 668.73,505.21 708.73,465.21 833.73,465.21 878.73,510.21 878.73,545.35 v1(866.3,557.78)
SDA: H1.2 R12.1 U2.3 U3.13 | length 1427.5
  Top Layer w6: v1(648.73,880.21) 683.73,880.21 693.07,870.87 U3.13 ; H1.2 1204.67,1054.11 1204.67,1088.79 1189.84,1103.62 1134.84,1103.62 1115.69,1084.46 1115.69,897.78 1139.84,873.62 1394.84,873.62 1403.69,882.46 U2.3
  Top Layer w10: R12.1@1204.84,973.74 1204.84,1053.62 H1.2
  Bottom Layer w6: v1(648.73,880.21) 753.73,985.21 978.73,985.21 1013.73,950.21 1151.43,950.21 v1(1205.1,1003.88)
VBUS: D1.2 D5.2 F1.1 Q1.1 R2.1 U4.4 | length 580.5
  Top Layer w6: 974.69,416.91 974.69,461.13 D5.2
  Top Layer w10: U4.4 881.42,278.58 875,285 875,380 893.91,398.91 930.76,398.91 946.43,414.58 D1.2 1025.69,413.58 F1.1@1099.69,413.58 ; Q1.1 F1.1@1099.69,413.58 ; F1.1@1099.69,413.78 F1.1@1099.69,413.58 ; R2.1 F1.1@1099.69,413.58
VGH: C1.1 D4.1 J2.21 | length 535.8
  Top Layer w8: v1(394.84,793.31) J2.21
  Top Layer w10: v1@529.84,1088.15 D4.1 C1.1
  Bottom Layer w6: v1(394.84,793.31) 474.41,793.31 530.1,849 v1(530.1,1088.41)
VGL: C2.2 D2.2 J2.23 | length 688.9
  Top Layer w8: v1(394.84,832.68) J2.23
  Top Layer w10: v1(248.73,832.68) 248.73,910.21 150.08,1008.87 150.08,1183.58 160.08,1193.58 C2.2 D2.2
  Bottom Layer w10: v1(248.73,832.68) v1(394.84,832.68)
XTAL_N: C27.1 U3.52 X1.3 | length 208.7
  Top Layer w6: X1.3 C27.1
  Top Layer w8: U3.52 1037.47,758.95 1047.04,768.52 X1.3
XTAL_P: C26.1 U3.53 X1.1 | length 194.6
  Top Layer w6: X1.1 X1.1@1013.73,863.21
  Top Layer w8: U3.53 964.22,774.7 974.73,785.21 974.73,824.21 X1.1 ; X1.1@1013.73,863.21 C26.1
pads on no net: A1.2 D6.3 J1. J1.A8 J1.B8 J2.1 J2.4 J2.6 J2.7 J2.19 U1.4 U2.7 U3.6 U3.7 U3.11 U3.12 U3.15 U3.17 U3.18 U3.19 U3.21 U3.22 U3.23 U3.28 U3.29 U3.31 U3.32 U3.33 U3.34 U3.35 U3.36 U3.40 U3.42 U3.43 U3.44 U3.46 U3.47 U3.48 U3.49 U3.50 U3.55

## Polygon pours and split planes (outlines as drawn)
GND on Layer 1 (GND) (split plane): 1426.92,1231.95 1431.53,1230.84 1435.92,1229.03 1439.97,1226.55 1443.57,1223.47 1446.66,1219.86 1449.14,1215.81 1450.95,1211.42 1452.06,1206.81 1452.39,1202.63 1452.34,1202.16 1452.34,50.19 1452.35,50.14 1452.4,49.63 1452.06,45.39 1450.97,40.81 1449.16,36.46 1446.71,32.45 1443.65,28.87 1440.07,25.81 1436.06,23.35 1431.71,21.55 1427.13,20.45 1423.07,20.13 1422.72,20.17 1422.49,20.15 1422.49,20.17 1421.73,20.1 52.32,20.1 50.44,20.28 50.4,20.28 49.89,20.23 45.64,20.56 41.06,21.66 36.72,23.46 32.7,25.92 29.13,28.98 26.07,32.56 23.61,36.57 21.81,40.92 20.71,45.49 20.34,50.14 20.43,50.14 20.1,53.49 20.1,251.84 19.93,253.52 20.16,256.45 21.26,261.03 23.06,265.37 25.52,269.39 28.58,272.97 32.16,276.02 36.17,278.48 40.52,280.28 45.09,281.38 49.34,281.72 49.85,281.67 49.89,281.66 154.89,281.66 155.03,281.68 161.87,282.01 168.67,283.02 175.34,284.69 181.82,287.01 188.04,289.95 193.94,293.49 199.46,297.58 204.56,302.2 209.18,307.3 213.27,312.82 216.81,318.72 219.75,324.94 222.07,331.41 223.74,338.09 224.75,344.89 225.06,351.36 225.1,351.68 225.1,896 225.06,896.33 224.75,902.79 223.74,909.6 222.07,916.27 219.75,922.74 216.81,928.96 213.27,934.86 209.18,940.38 204.56,945.48 199.46,950.1 193.94,954.2 188.04,957.73 181.82,960.67 175.34,962.99 168.67,964.66 161.87,965.67 158.93,965.81 158.81,965.85 154.89,966.23 49.89,966.23 48.12,966.06 45.09,966.3 40.52,967.4 36.17,969.2 32.16,971.66 28.58,974.71 25.52,978.29 23.06,982.31 21.26,986.65 20.16,991.23 19.93,994.16 20.1,995.85 20.1,1201.11 20.17,1201.89 20.17,1201.94 20.12,1202.44 20.45,1206.69 21.55,1211.27 23.35,1215.62 25.81,1219.63 28.87,1223.21 32.45,1226.26 36.46,1228.72 40.81,1230.52 45.39,1231.62 49.35,1231.94 50,1231.87 50.01,1231.87 692.44,1232.04 692.44,1090.98 853.84,1090.98 853.84,709.53 877.84,709.53 877.84,1090.98 992.44,1090.98 992.44,1232.12 1422.08,1232.24 1422.64,1232.29
+3.3V on Layer 2 (PWR) (split plane): 1426.92,1231.95 1431.53,1230.84 1435.92,1229.03 1439.97,1226.55 1443.57,1223.47 1446.66,1219.86 1449.14,1215.81 1450.95,1211.42 1452.06,1206.81 1452.39,1202.63 1452.34,1202.16 1452.34,50.19 1452.35,50.14 1452.4,49.63 1452.06,45.39 1450.97,40.81 1449.16,36.46 1446.71,32.45 1443.65,28.87 1440.07,25.81 1436.06,23.35 1431.71,21.55 1427.13,20.45 1423.07,20.13 1422.72,20.17 1422.49,20.15 1422.49,20.17 1421.73,20.1 52.32,20.1 50.44,20.28 50.4,20.28 49.89,20.23 45.64,20.56 41.06,21.66 36.72,23.46 32.7,25.92 29.13,28.98 26.07,32.56 23.61,36.57 21.81,40.92 20.71,45.49 20.34,50.14 20.43,50.14 20.1,53.49 20.1,251.84 19.93,253.52 20.16,256.45 21.26,261.03 23.06,265.37 25.52,269.39 28.58,272.97 32.16,276.02 36.17,278.48 40.52,280.28 45.09,281.38 49.34,281.72 49.85,281.67 49.89,281.66 154.89,281.66 155.03,281.68 161.87,282.01 168.67,283.02 175.34,284.69 181.82,287.01 188.04,289.95 193.94,293.49 199.46,297.58 204.56,302.2 209.18,307.3 213.27,312.82 216.81,318.72 219.75,324.94 222.07,331.41 223.74,338.09 224.75,344.89 225.06,351.36 225.1,351.68 225.1,896 225.06,896.33 224.75,902.79 223.74,909.6 222.07,916.27 219.75,922.74 216.81,928.96 213.27,934.86 209.18,940.38 204.56,945.48 199.46,950.1 193.94,954.2 188.04,957.73 181.82,960.67 175.34,962.99 168.67,964.66 161.87,965.67 158.93,965.81 158.81,965.85 154.89,966.23 49.89,966.23 48.12,966.06 45.09,966.3 40.52,967.4 36.17,969.2 32.16,971.66 28.58,974.71 25.52,978.29 23.06,982.31 21.26,986.65 20.16,991.23 19.93,994.16 20.1,995.85 20.1,1201.11 20.17,1201.89 20.17,1201.94 20.12,1202.44 20.45,1206.69 21.55,1211.27 23.35,1215.62 25.81,1219.63 28.87,1223.21 32.45,1226.26 36.46,1228.72 40.81,1230.52 45.39,1231.62 49.35,1231.94 50,1231.87 50.01,1231.87 692.44,1232.04 692.44,1090.98 853.84,1090.98 853.84,709.68 877.84,709.68 877.84,1090.98 992.44,1090.98 992.44,1232.12 1422.08,1232.24 1422.64,1232.29

## Other copper
Top Layer:
  rectangle net GND: 1219.69,448.58 1247.69,508.58
  rectangle net GND: 1219.69,743.58 1248.69,803.58
  pour cut-out: 692.44,1250.98 692.44,1090.98 992.44,1090.98 992.44,1250.98
  text "1" at 1381.69,610.58 h40
Bottom Layer:
  pour cut-out: 692.44,1250.98 692.44,1090.98 992.44,1090.98 992.44,1250.98
  text "4" at 1402.69,610.58 h40
Layer 1 (GND) (plane layer: these items are gaps in the copper):
  pour cut-out: 853.84,1251.82 853.84,709.53 877.84,709.53 877.84,1251.82
  pour cut-out: 692.44,1250.98 692.44,1090.98 992.44,1090.98 992.44,1250.98
  text "2" at 1376.69,610.58 h40
Layer 2 (PWR) (plane layer: these items are gaps in the copper):
  pour cut-out: 853.84,1251.97 853.84,709.68 877.84,709.68 877.84,1251.97
  pour cut-out: 692.44,1250.98 692.44,1090.98 992.44,1090.98 992.44,1250.98
  text "3" at 1376.69,610.58 h40

## Silkscreen, mask and mechanical layers (free items; w line width, h text height)
Top Overlay:
  text "LED" at 123.73,1148.49 h35 r270
  text "QwiiC" at 1413.71,1073.91 h35 r90
  text "CHG" at 911.69,503.91 h35
  text "IO0" at 169.44,194 h35
  text "ESP32-S2" at 800.73,97.21 h40
  text "-" at 533.56,65.64 h40
  text "+" at 718.56,63.97 h40
  text "RST" at 169.44,59 h35
  text "1.54\"" at 800.73,32.21 h40
  text "E-INK" at 1015.73,32.21 h40
  text "REV 3" at 1230.73,32.21 h40
  text "LiPo" at 587,27.19 h35
Mechanical 1:
  lines w10: -0.22,251.84 cw(c49.78,251.76) 49.89,301.76 ; -0.22,995.85 ccw(c49.78,995.92) 49.89,945.92 ; 0,50.11 0,251.84 ; 0,995.85 0,1201.89 ; 0.08,1201.89 cw(c50.08,1202) 50,1252 ; 0.33,50.11 ccw(c50.33,50.19) 50.44,0.19 ; 49.89,946.14 154.89,946.14 ; 50,1251.97 1422.08,1252.33 cw(c1422.19,1202.08) 1472.44,1202.16 1472.44,50.19 cw(c1422.44,50.08) 1422.52,0.08 ; 50.44,0 1422.11,0 ; 51.06,301.76 154.89,301.76 ccw(c155,351.76) 205,351.68 205,896 ccw(c155,895.92) 154.89,945.92